# Altium PCB PCB.PcbDoc
Units mm, origin at the board's own origin, x right, y up, seen from the top; angles counter-clockwise.
Board outline 68 x 65 mm, 4 copper layers (L1, L2, L3, L4), stack 0.603 mm thick; 42 components, 21 nets, 130 pads, 601 vias.
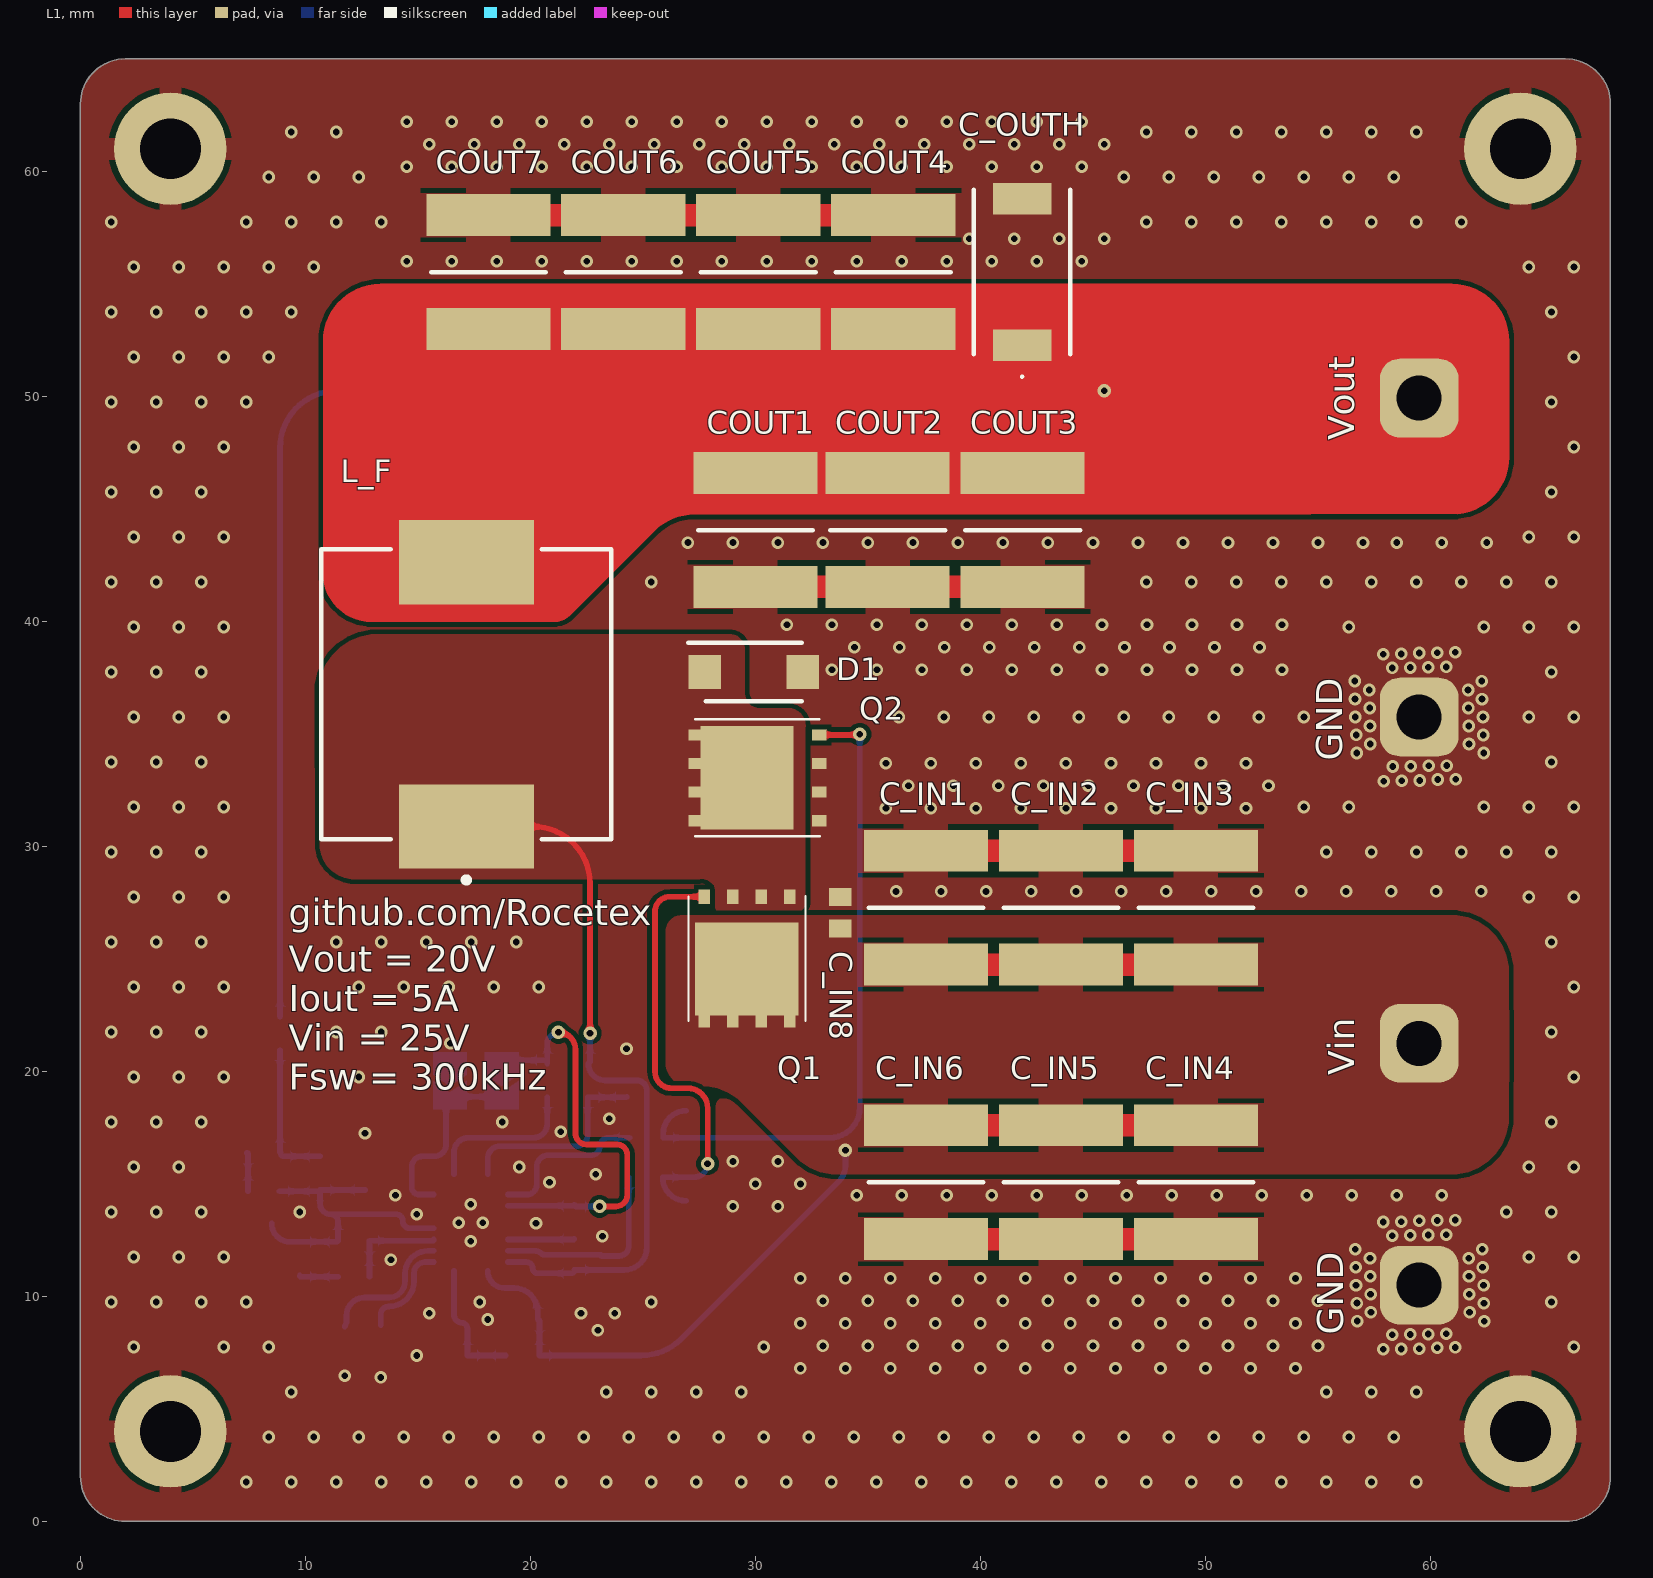
[diagram p0: L1 view]
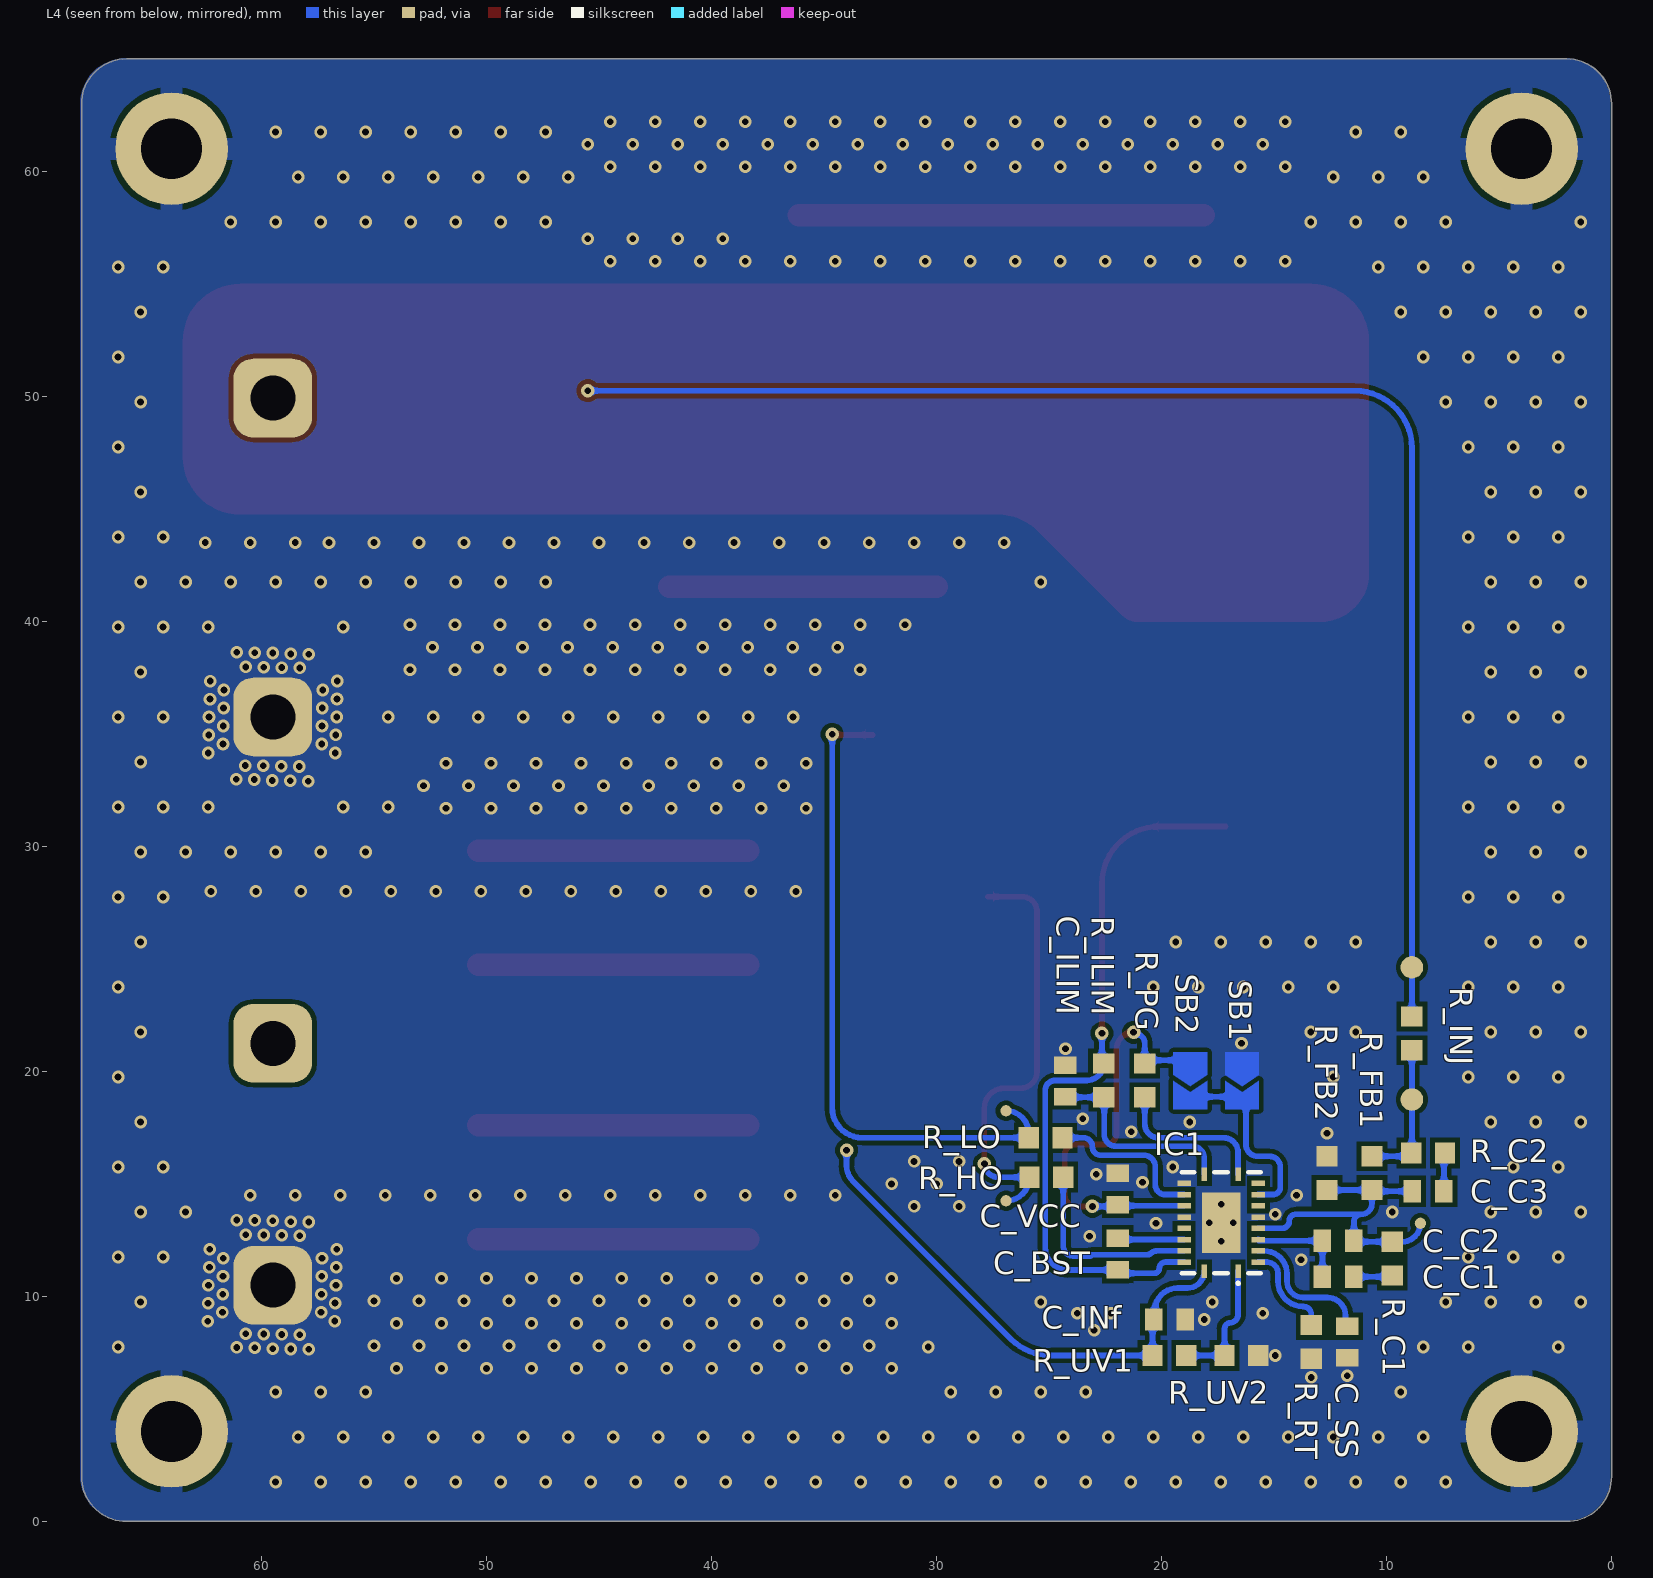
[diagram p1: L4 view, seen from below]
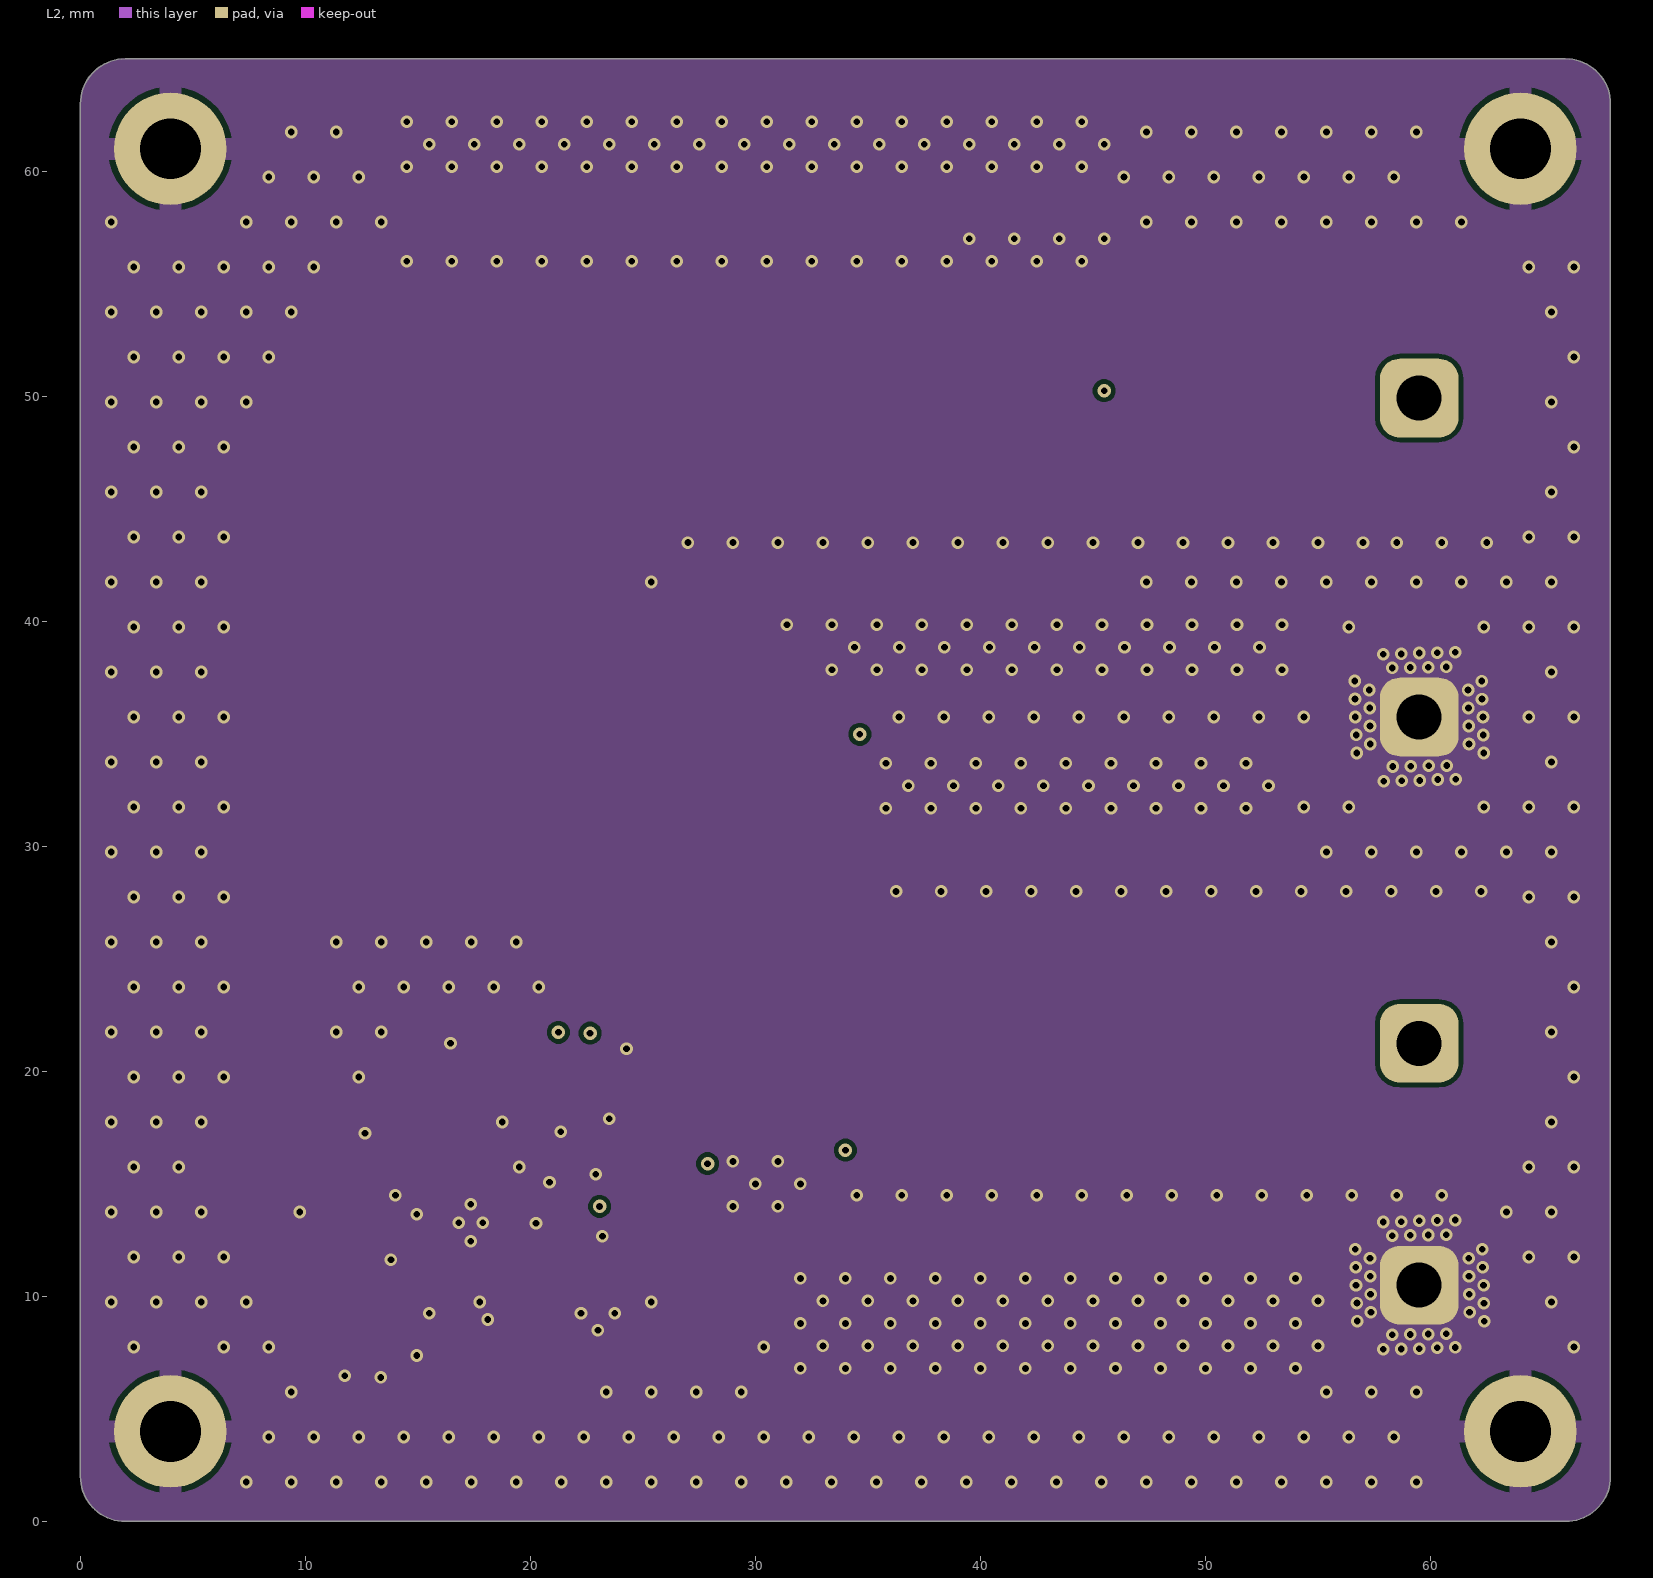
[diagram p2: L2]
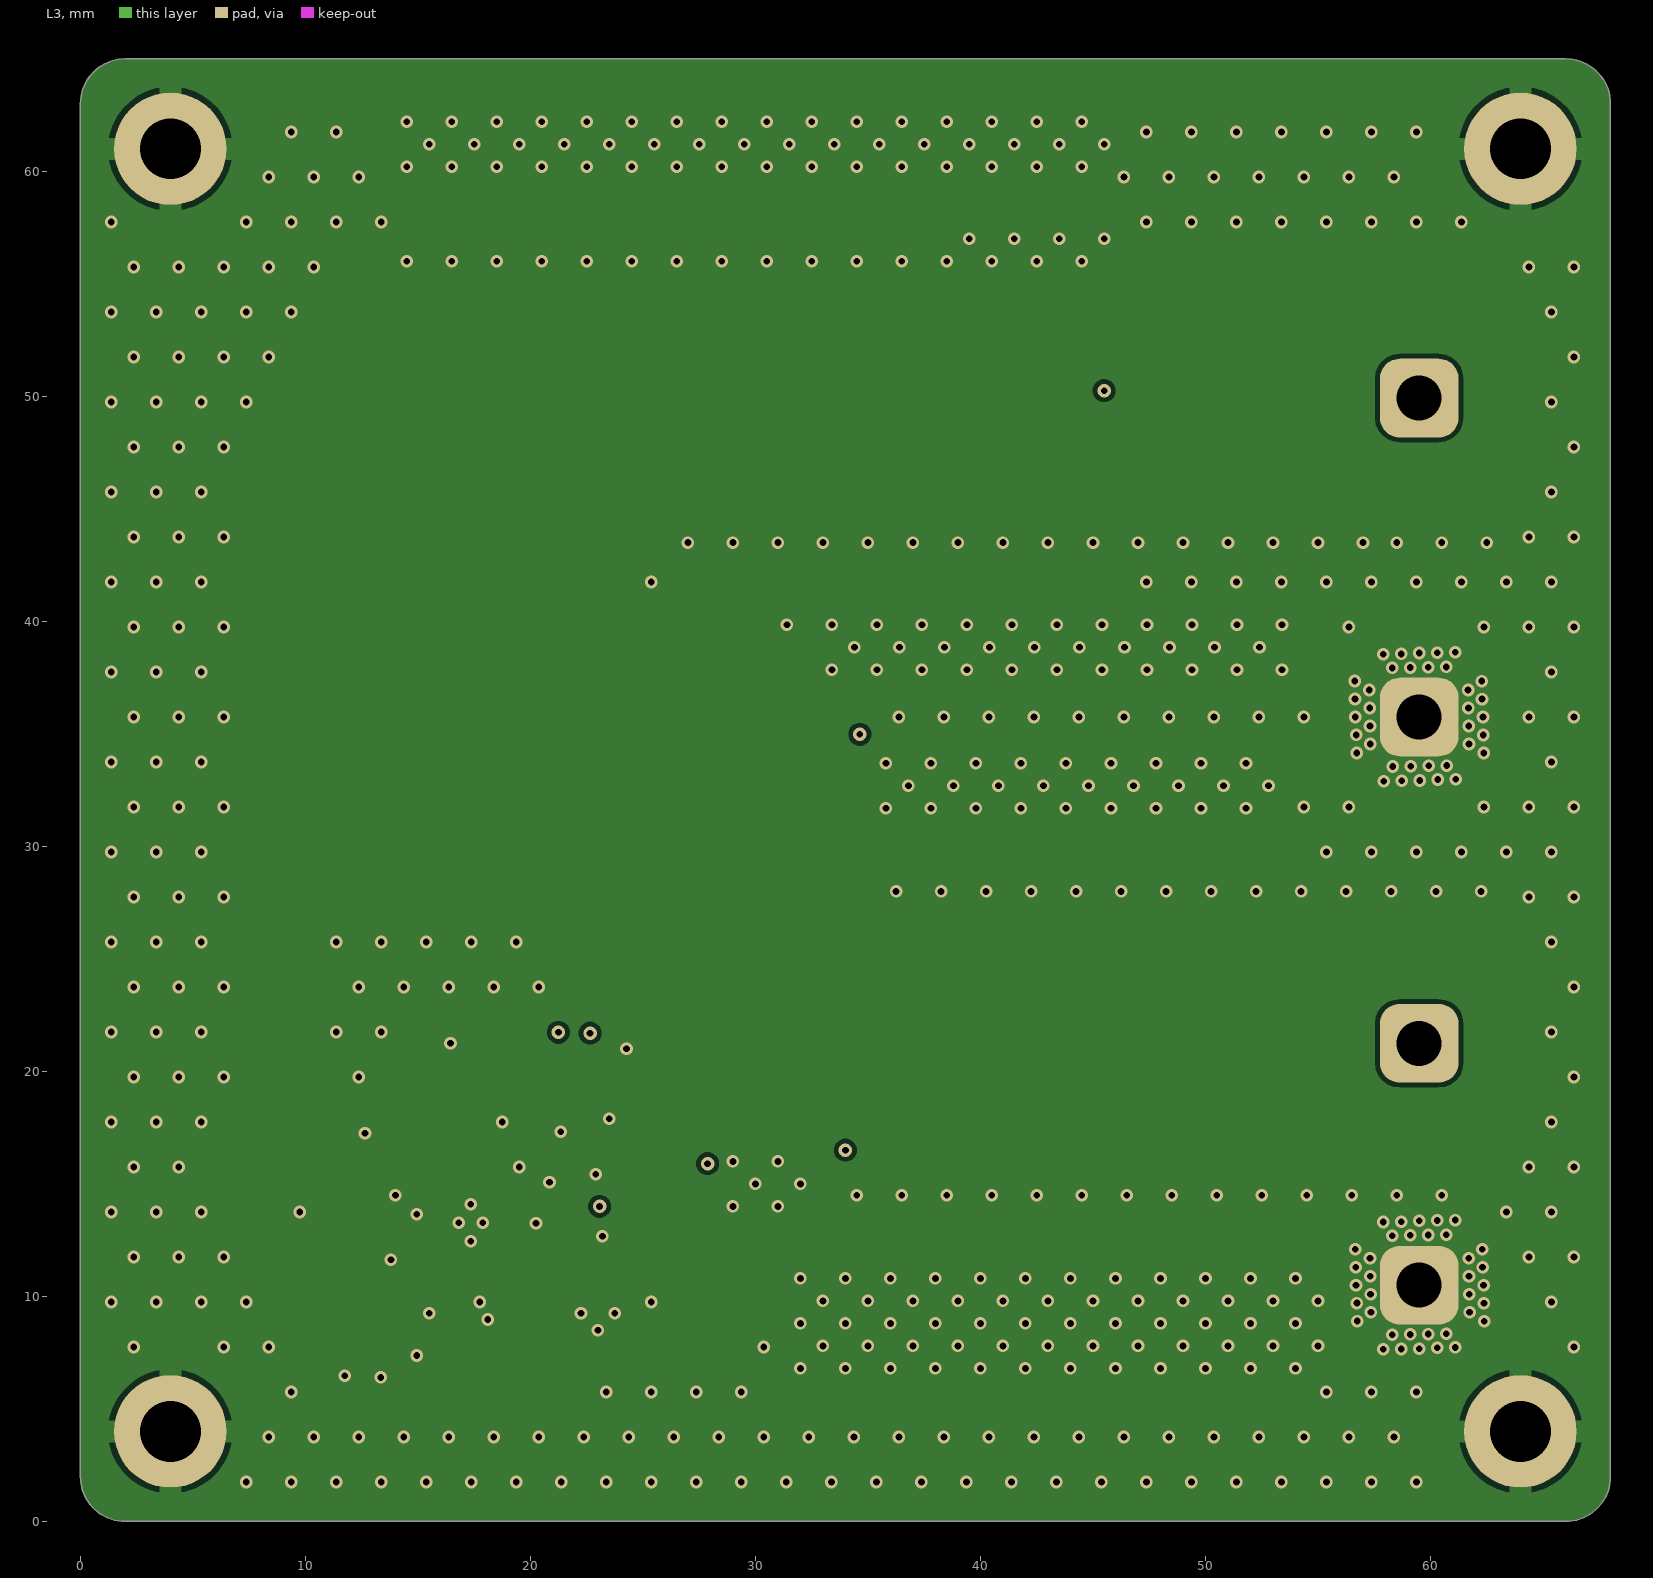
[diagram p3: L3]
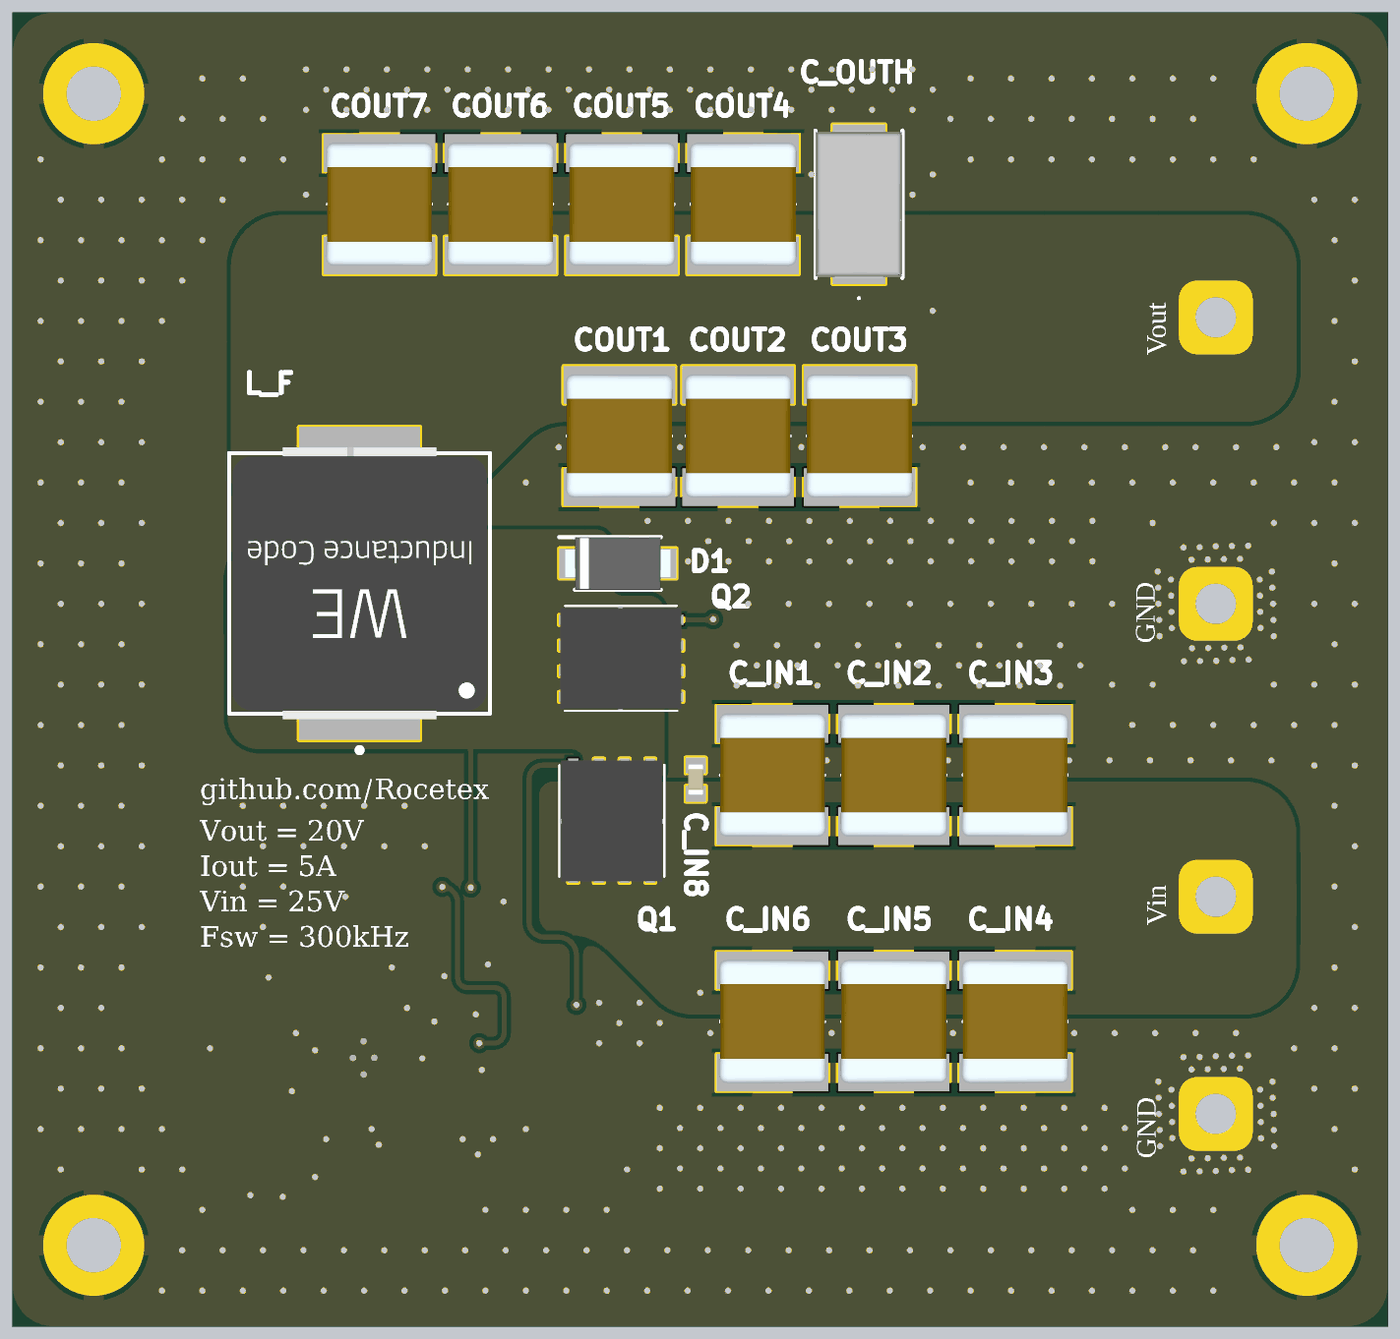
[diagram p4: 3D render of the assembled board from above, using the file's embedded part models]
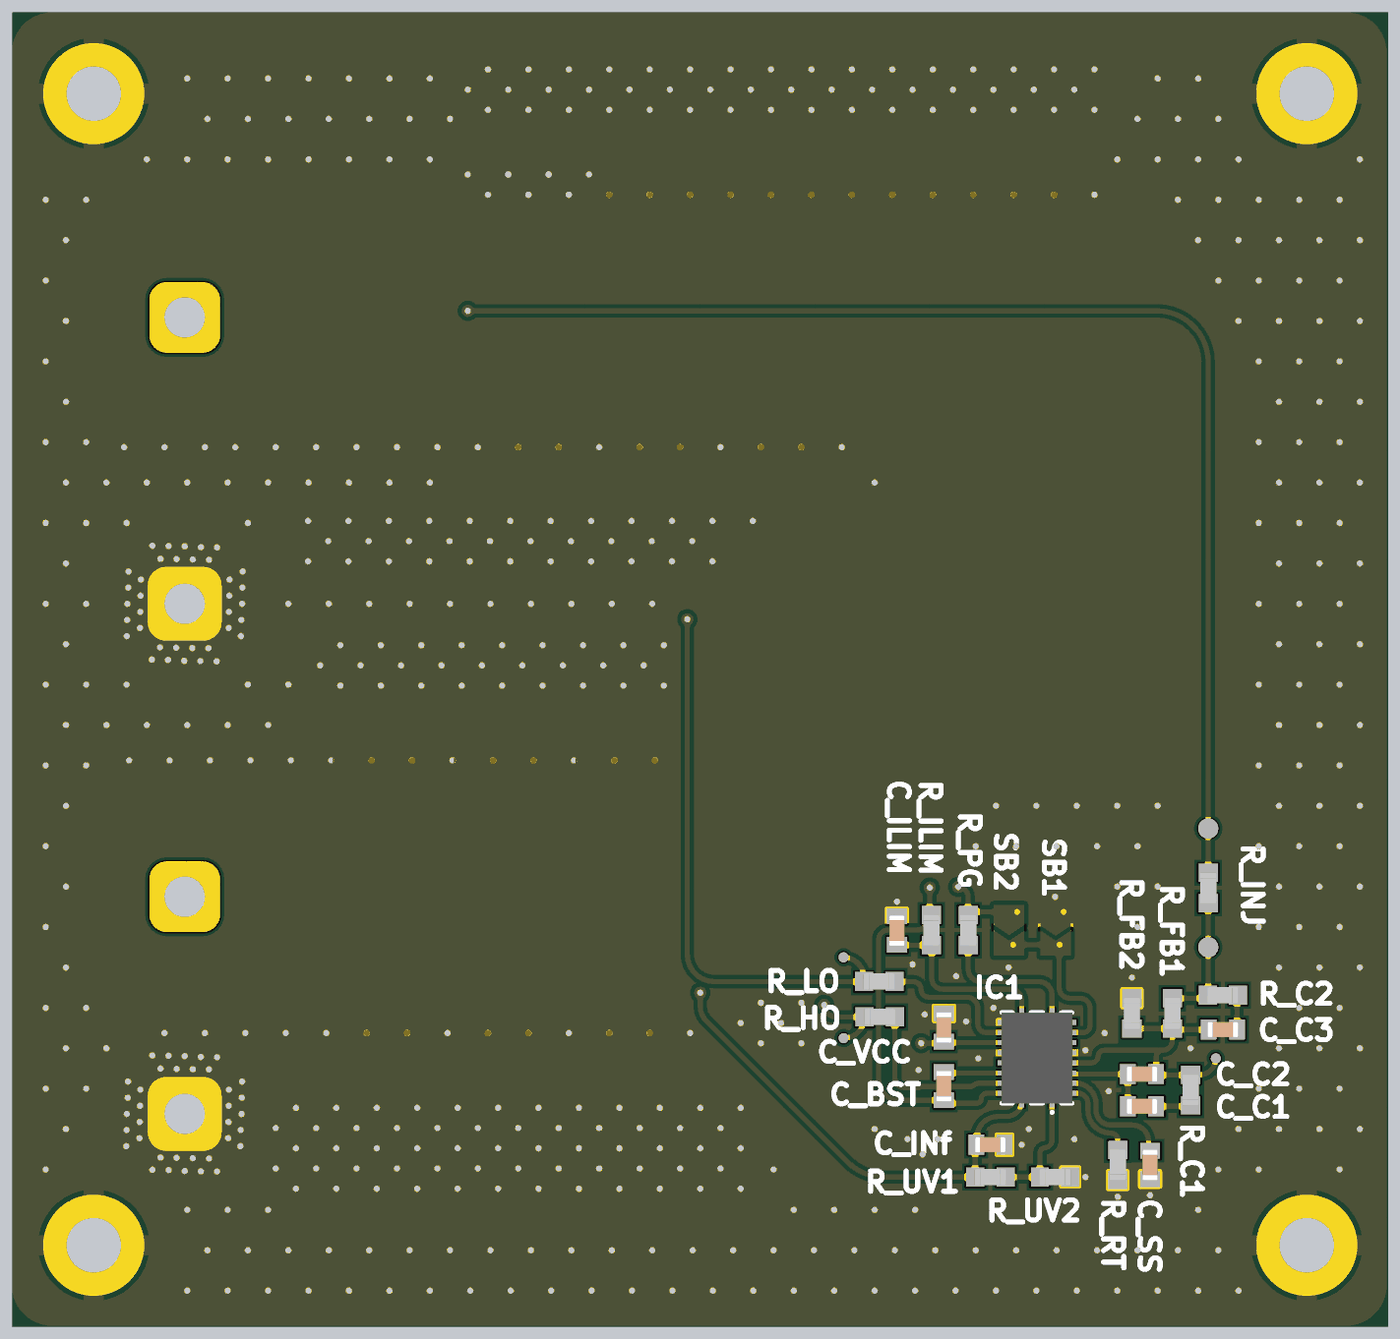
[diagram p5: 3D render of the assembled board from below, using the file's embedded part models]

## Layer stack, top to bottom
Top Solder: solder mask 0.0102, Solder Resist, Dk 3.5
L1: signal copper 0.035
Dielectric 2: prepreg 0.0711, PP-006, Dk 4.1
L2: signal copper 0.0356
Dielectric 1: dielectric 0.32, FR-4, Dk 4.8
L3: signal copper 0.0356
Dielectric 3: prepreg 0.0711, PP-006, Dk 4.1
L4: signal copper 0.035
Bottom Solder: solder mask 0.0102, Solder Resist, Dk 3.5

## Board outline
0,2 0,63 cw(c2,63) 2,65 66,65 cw(c66,63) 68,63 68,2 cw(c66,2) 66,0 2,0 cw(c2,2)

## Design rules (kind name [scope] priority, off if disabled: settings)
Clearance [All] p1: gap=0.12 ignorepadtopadclearanceinfootprint=FALSE except(0.2: Arc-Poly Arc-Hole Track-Poly Track-Hole SMDPad-Poly SMDPad-Hole THPad-Poly THPad-Hole Via-Poly Via-Hole Fill-Poly Fill-Hole Poly-Poly Poly-Region Poly-Hole Region-Hole Text-Hole; 0.254: Arc-Text Track-Text SMDPad-Text THPad-Text Via-Text Fill-Text Poly-Text Region-Text Text-Text)
HoleSize [All] p1: absolutevalues=TRUE maxlimit=5 minlimit=0.025 maxpercent=80.000 minpercent=20.000
HoleToHoleClearance [All] p1: gap=0.2 allowstackedmicrovias=TRUE
PolygonConnect [All] p1: connectstyle=Relief reliefconductorwidth=0.254 reliefentries=4 polygonreliefangle="90 Angle" airgapwidth=0.254
RoutingVias [All] p1: holewidth=0.3 width=0.6 viastyle="Through Hole" minholewidth=0.2 minwidth=0.5 maxholewidth=0.711 maxwidth=1.27
SolderMaskExpansion SolderMaskExpansion_Via [IsVia] p1: expansion=0.102 istentingtop=TRUE
SolderMaskExpansion [All] p2: expansion=0.102 istentingtop=FALSE
SupplyNets "Schematic Supply Nets_2" [InNet('VOUT')] p1: voltage=0.000
SupplyNets "Schematic Supply Nets_1" [InNet('GND')] p2: voltage=0.000
SupplyNets "Schematic Supply Nets" [InNet('VIN')] p3: voltage=0.000
Width [All] p1: maxlimit=5 minlimit=0.025 preferedwidth=0.254 minimp=50.000000 maximp=50.000000 favimp=50.000000
28 further rules are at their usual default settings.

## Components (designator, comment, footprint, x,y, rotation, side; value= is the part's Value field where it differs from the comment)
C_BST "100n" CAPC1608X90N 21.95,11.875 r270 bottom
C_C1 "47p" CAPC1608X90N 12.15,10.875 r180 bottom
C_C2 "47p" CAPC1608X90N 12.15,12.475 r180 bottom
C_C3 "47p" CAPC1608X90N 8.15,14.675 r0 bottom
C_ILIM "47p" CAPC1608X90N 24.275,19.575 r90 bottom
C_IN1 "10u" CAPC6153X390N 37.575,27.275 r90 top
C_IN2 "10u" CAPC6153X390N 43.575,27.275 r90 top
C_IN3 "10u" CAPC6153X390N 49.575,27.275 r90 top
C_IN4 "10u" CAPC6153X390N 49.575,15.075 r270 top
C_IN5 "10u" CAPC6153X390N 43.575,15.075 r270 top
C_IN6 "10u" CAPC6153X390N 37.575,15.075 r270 top
C_IN8 "100n" CAPC1608X90N 33.775,27.05 r90 top
C_INf "100n" CAPC1608X90N 19.65,8.975 r0 bottom
C_OUTH "68u" 35TQS68ME2 41.85,55.525 r90 top
C_SS "47n" CAPC1608X90N 11.75,7.975 r90 bottom
C_VCC "2.2u" CAPC1608X90N 21.95,14.775 r90 bottom
COUT1 "22u" CAPC6153X390N 30,44.058 r270 top
COUT2 "22u" CAPC6153X390N 35.875,44.058 r270 top
COUT3 "22u" CAPC6153X390N 41.875,44.058 r270 top
COUT4 "22u" CAPC6153X390N 36.125,55.525 r90 top
COUT5 "22u" CAPC6153X390N 30.125,55.525 r90 top
COUT6 "22u" CAPC6153X390N 24.125,55.525 r90 top
COUT7 "22u" CAPC6153X390N 18.135,55.525 r90 top
D1 "VSSAF3M10-M3_H" SODFL5226X100N 29.925,37.75 r0 top
IC1 "LM5145RGYR" RGY0020B 17.35,13.275 r0 bottom
L_F "8.2uH, 11.6A" WE-LHCA_1365 17.15,36.76 r180 top
Q1 "AON6512" AON6414A 29.625,25 r180 top
Q2 "AON6512" AON6414A 30.075,33.05 r90 top
R_C1 "127" RESC1608X55N 9.75,11.675 r270 bottom
R_C2 "127" RESC1608X55N 8.15,16.375 r180 bottom
R_FB1 "21k" RESC1608X55N 10.65,15.475 r270 bottom
R_FB2 "876" RESC1608X55N 12.65,15.475 r90 bottom
R_HO "1" RESC1608X55N 25.125,15.3 r180 bottom
R_ILIM "127" RESC1608X55N 22.575,19.6 r270 bottom
R_INJ "20" RESC1608X55N 8.875,21.688 r270 bottom
R_LO "1" RESC1608X55N 25.15,17.05 r180 bottom
R_PG "20k" RESC1608X55N 20.75,19.6 r90 bottom
R_RT "33.2k" RESC1608X55N 13.35,7.975 r270 bottom
R_UV1 "200k" RESC1608X55N 19.65,7.375 r180 bottom
R_UV2 "10k" RESC1608X55N 16.45,7.375 r0 bottom
SB1 "Solder_Bridge" Solderbridge 16.025,20.4 r0 bottom
SB2 "Solder_Bridge" Solderbridge 18.325,20.4 r0 bottom

## Footprints (in the part's own frame and the unit in brackets; to place one, negate y for a bottom-side part, rotate by r counter-clockwise, add the part's x,y. Pads: shape width x height; smd on the part's side, far side on the other; paste and mask are expansions set on the pad)
35TQS68ME2 [mm]
  rect 1.4x2.6 smd: 1(-3.25,0) 2(3.25,0)
  silkscreen extent -4.7,-2.15 3.65,2.15, body extent -3.65,-2.15 3.65,2.15, height 1.9
AON6414A [mm]
  rect 0.5x0.65 smd: 1(-1.905,-2.765) 2(-0.635,-2.765) 3(0.635,-2.765) 4(1.905,-2.765)
  rect 0.5x0.55 smd: 5(1.905,2.785) 6(0.635,2.785) 7(-0.635,2.785) 8(-1.905,2.785)
  rect 4.6x4.12 smd: 9(0,0.45)
  silkscreen extent -2.6,-2.79 2.6,2.77, body extent -2.52,-3.01 2.52,3.01, height 0.91
CAPC1608X90N [mm]
  rect 0.78x0.99 smd: 1(-0.7,0) 2(0.7,0)
  body extent -0.76,-0.38 0.76,0.38, height 0.91
CAPC6153X390N [mm]
  rect 1.86x5.52 smd: 1(-2.53,0) 2(2.53,0)
  silkscreen extent 0,-2.55 0,2.55, body extent -3.05,-2.65 3.05,2.65, height 3.9
RESC1608X55N [mm]
  rect 0.9x0.95 smd: 1(-0.75,0) 2(0.75,0)
  body extent -0.77,-0.4 0.77,0.4, height 0.46
RGY0020B [mm]
  rect 0.25x0.6 smd: 1(-0.75,2.15) 10(-0.75,-2.15) 11(0.75,-2.15) 20(0.75,2.15)
  rect 0.6x0.25 smd: 2(-1.65,1.75) 3(-1.65,1.25) 4(-1.65,0.75) 5(-1.65,0.25) 6(-1.65,-0.25) 7(-1.65,-0.75) 8(-1.65,-1.25) 9(-1.65,-1.75) 12(1.65,-1.75) 13(1.65,-1.25) 14(1.65,-0.75) 15(1.65,-0.25) 16(1.65,0.25) 17(1.65,0.75) 18(1.65,1.25) 19(1.65,1.75)
  rect 1.7x2.7 smd: 21(0,0)
  silkscreen extent -1.75,-2.25 1.75,2.71, body extent -1.75,-2.25 1.75,2.25, height 1
SODFL5226X100N [mm]
  rect 1.45x1.49 smd: 1(-2.175,0) 2(2.175,0)
  silkscreen extent -2.9,-1.3 2.12,1.3, body extent -2.6,-1.3 2.6,1.3, height 1
Solderbridge [mil]
  round 1 smd mask+5.12: 1(0,-3.94) 2(7.87,60.04)
  L1 region: 15.75,41.34 45.28,21.65 45.28,-17.72 -13.78,-17.72 -13.78,21.65
  L1 region: 45.28,32.48 15.75,52.17 -13.78,32.48 -13.78,81.69 45.28,81.69
WE-LHCA_1365 [mm] "SMD Power Inductor, 2-Leads, body 13.45 x 12.60 mm"
  rect 6x3.75 smd: 1(0,5.875) 2(0,-5.875)
  silkscreen extent -6.45,-6.45 6.45,8.37, body extent -6.3,-6.72 6.3,6.73, height 6.46

## Part data
C_BST C_IN8 C_INf C_SS: library part GRM1885C1H101JA01D, "Capacitor", Manufacturer_Name="Murata Electronics", Mouser Part Number=81-GRM39C101J50, Arrow Part Number=GRM1885C1H101JA01D, Arrow Price/Stock=https://www.arrow.com/en/products/grm1885c1h101ja01d/murata-manufacturing?utm_currency=USD&region=europe, Datasheet Link=https://search.murata.co.jp/Ceramy/image/img/A01X/G101/ENG/GRM1885C1H101JA01-01A.pdf, Height=0.9mm, Manufacturer_Part_Number=GRM1885C1H101JA01D, Mouser Price/Stock=https://www.mouser.co.uk/ProductDetail/Murata-Electronics/GRM1885C1H101JA01D?qs=H3lwsW1hsDt1I4guwPQ00A%3D%3D
C_C1 C_C2 C_C3 C_ILIM C_VCC: library part 06031A470JAT2A, "Capacitor", Manufacturer_Name="Kyocera AVX", Mouser Part Number=581-06031A470J, Arrow Part Number=06031A470JAT2A, Arrow Price/Stock=https://www.arrow.com/en/products/06031a470jat2a/avx, Datasheet Link=https://componentsearchengine.com/Datasheets/1/06031A100FAT2A.pdf, Height=0.9mm, Manufacturer_Part_Number=06031A470JAT2A, Mouser Price/Stock=https://www.mouser.co.uk/ProductDetail/AVX/06031A470JAT2A?qs=nNiE93Mz5OcjglFzY7DsjQ%3D%3D
C_IN1 C_IN2 C_IN3 C_IN4 C_IN5 C_IN6: library part KRM55QR71J106KH01K, "Capacitor / KRM55QR71J106KH01K", Manufacturer_Name="Murata Electronics", Mouser Part Number=81-KRM55QR71J106KH1K, Arrow Part Number=KRM55QR71J106KH01K, Arrow Price/Stock=https://www.arrow.com/en/products/krm55qr71j106kh01k/murata-manufacturing, Datasheet Link=https://search.murata.co.jp/Ceramy/image/img/A01X/G101/ENG/KRM55_25V-100V_E.pdf, Height=3.9mm, Manufacturer_Part_Number=KRM55QR71J106KH01K, Mouser Price/Stock=https://www.mouser.co.uk/ProductDetail/Murata-Electronics/KRM55QR71J106KH01K?qs=TpyF2b7C1Q%252BAGaaMhvrt1g%3D%3D
C_OUTH: library part 35TQS68ME2, "Capacitor Polarised", Manufacturer_Name=Panasonic, Datasheet Link=https://industrial.panasonic.com/cdbs/www-data/pdf/AAA8000/AAA8000C80.pdf, Height=2mm, Manufacturer_Part_Number=35TQS68ME2, Simulation Data=https://industrial.panasonic.com/content/data/CP/files/35TQS68ME2.zip
COUT1 COUT2 COUT3 COUT4 COUT5 COUT6 COUT7: library part KCM55QR71H226KH13K, "Capacitor / KCM55QR71H226KH13K", Manufacturer_Name="Murata Electronics", Mouser Part Number=81-KCM5QR71H226KH13K, Arrow Part Number=KCM55QR71H226KH13K, Arrow Price/Stock=https://www.arrow.com/en/products/kcm55qr71h226kh13k/murata-manufacturing?region=nac, Datasheet Link=https://search.murata.co.jp/Ceramy/image/img/A01X/G101/ENG/KCM55_E.pdf, Height=3.9mm, Manufacturer_Part_Number=KCM55QR71H226KH13K, Mouser Price/Stock=https://www.mouser.co.uk/ProductDetail/Murata-Electronics/KCM55QR71H226KH13K?qs=By6Nw2ByBD05%2F38SiX9q2w%3D%3D
D1: "Schottky Diode", Arrow Part Number=VSSAF3M10-M3/H, Manufacturer_Name=Vishay, Mouser Part Number=78-VSSAF3M10-M3/H, Arrow Price/Stock=https://www.arrow.com/en/products/vssaf3m10-m3h/vishay, Datasheet Link=https://www.vishay.com/docs/87507/vssaf3m10.pdf, Height=1mm, Manufacturer_Part_Number=VSSAF3M10-M3/H, Mouser Price/Stock=https://www.mouser.co.uk/ProductDetail/Vishay-General-Semiconductor/VSSAF3M10-M3-H?qs=ECv811tYSNjzBSZPydhz4A%3D%3D
IC1: "Integrated Circuit", Manufacturer_Name="Texas Instruments", Mouser Part Number=595-LM5145RGYR, Arrow Part Number=LM5145RGYR, Arrow Price/Stock=https://www.arrow.com/en/products/lm5145rgyr/texas-instruments?region=nac, Datasheet Link=http://www.ti.com/lit/ds/symlink/lm5145.pdf?HQS=TI-null-null-mousermode-df-pf-null-wwe&DCM=yes&ref_url=https%3A%2F%2Fwww.mouser.com%2F, Manufacturer_Part_Number=LM5145RGYR, Mouser Price/Stock=https://www.mouser.co.uk/ProductDetail/Texas-Instruments/LM5145RGYR?qs=gt1LBUVyoHkKVoSLabi7ZQ%3D%3D
L_F: library part 784373865082, "WE-LHCA Low Profile High Current Inductor, SMT, size 1365, 8.2uH, 11.6A", Case/Size Code=1365, DC Resistance=12mOhm, Inductance=8.2uH, Manufacturer="Wurth Elektronik", Max Operating Temperature=155°C, Min Operating Temperature=-55°C, Performance Rated Current=11.6A, Saturation Current=20.2A, Category="Power Inductors", ComponentLink1Description="Website Link", ComponentLink1URL=https://www.we-online.com/redexpert/article/784373865082?ad, ComponentLink2Description="Datasheet Link", ComponentLink2URL=https://www.we-online.com/redexpert/spec/784373865082?ad, Height=6.3mm, Length=13.45mm, Manufacturer Part Number=784373865082, Match Code=WE-LHCA, Mount="Surface Mount", Packaging="Tape and Reel", Width=12.6mm
Q1 Q2: "MOSFET (P-Channel)", Manufacturer_Name="Alpha & Omega Semiconductors", Arrow Part Number=AON6512, Arrow Price/Stock=https://www.arrow.com/en/products/aon6512/alpha-and-omega-semiconductor?region=nac, Datasheet Link=http://aosmd.com/res/data_sheets/AON6512.pdf, Manufacturer_Part_Number=AON6512
R_C1 R_C2 R_FB1 R_FB2 R_ILIM R_INJ R_PG: library part ERJ-3EKF1270V, "Resistor", Manufacturer_Name=Panasonic, Mouser Part Number=667-ERJ-3EKF1270V, Arrow Part Number=ERJ-3EKF1270V, Arrow Price/Stock=https://www.arrow.com/en/products/erj3ekf1270v/panasonic, Datasheet Link=http://industrial.panasonic.com/cdbs/www-data/pdf/RDA0000/AOA0000C86.pdf, Height=0.55mm, Manufacturer_Part_Number=ERJ-3EKF1270V, Mouser Price/Stock=https://www.mouser.co.uk/ProductDetail/Panasonic/ERJ-3EKF1270V?qs=iBwFsHVUAOcgnyLg6A6PxQ%3D%3D
R_HO R_LO R_RT R_UV1 R_UV2: library part RC0603FR-105K1L, "Resistor", Manufacturer_Name=YAGEO, Mouser Part Number=603-RC0603FR-105K1L, Arrow Part Number=RC0603FR-105K1L, Arrow Price/Stock=https://www.arrow.com/en/products/rc0603fr-105k1l/yageo?utm_currency=USD&region=nac, Datasheet Link=https://www.mouser.com/datasheet/2/447/PYu_RC_Group_51_RoHS_L_11-1984063.pdf, Height=0.55mm, Manufacturer_Part_Number=RC0603FR-105K1L, Mouser Price/Stock=https://www.mouser.co.uk/ProductDetail/YAGEO/RC0603FR-105K1L?qs=qpJ%252B%252B%252Bdg6p362H%2FoHYJ5dQ%3D%3D

## Free pads (board coordinates)
  round 5 hole 2.7 mask+0: MH2(4,4) MH2(4,61) MH2(64,4) MH2(64,61)
  rrect50% 3.5x3.5 hole 2 mask-2539.97: q6(59.5,10.5) q7(59.5,21.25) q8(59.5,49.925) q9(59.5,35.75)
  round 0.5 smd far side mask-2539.97: q10(8.5,13.25) q10(26.912,14.25) q10(26.912,18.25)
  round 1 smd far side mask-2539.97: q10(8.875,18.75) q10(8.875,24.627)

## Via types
v1: diameter 0.56, hole 0.3, L1 to L4, tented both sides, 594 vias
v2: diameter 0.6, hole 0.3, L1 to L4, tented both sides, 7 vias

## Nets (pads, with @x,y where several pads share a name; then routed paths per layer and width w, separated by ;. In a path a pad name is that pad's centre, name@x,y a point inside that pad or via, vN(x,y) a via of type N, cw(c..) or ccw(c..) an arc to the next point about the centre after c; other vN are vias at no path point)
COMP: C_C1.1 C_C2.1 IC1.4 | length 4.5
  L4 w0.254: C_C1.1 C_C2.1 15.65,12.475 ccw(c15.65,12.525) IC1.4
FB: C_C2.2 C_C3.2 IC1.5 pad.q10@8.5,13.25 R_C1.1 R_FB1.2 R_FB2.1 | length 14.8
  L4 w0.254: pad.q10@8.5,13.25 ccw(c9.325,13.25) 9.325,12.425 R_C1.1 C_C2.2@11.4,12.425 ; C_C3.2 R_FB1.2@10.6,14.675 ; C_C2.2 11.45,13.325 ccw(c11.125,13.325) 11.125,13.65 ; R_FB2.1 R_FB1.2 10.65,14.125 ccw(c11.125,14.125) 11.125,13.65 ; IC1.5 14.65,13.025 cw(c14.65,13.35) 14.325,13.35 ccw(c14.025,13.35) 14.025,13.65 11.125,13.65
GND: C_ILIM.2 C_IN1.2 C_IN2.2 C_IN3.2 C_IN4.2 C_IN5.2 C_IN6.2 C_IN8.2 C_INf.1 C_OUTH.2 C_SS.1 C_VCC.2 COUT1.2 COUT2.2 COUT3.2 COUT4.2 COUT5.2 COUT6.2 COUT7.2 D1.2 IC1.6 IC1.12 IC1.15 IC1.21 pad.MH2 pad.q6 pad.q9 Q2.1 Q2.2 Q2.3 R_FB2.2 R_RT.2 R_UV2.1 SB1.1 | length 53.9
  L1 w1: COUT7.2 COUT4.2 ; COUT1.2 COUT3.2 ; C_IN6.2@38.375,12.545 C_IN4.2@50.375,12.545 ; C_IN1.2@38.375,29.805 C_IN3.2@50.375,29.805
  other v1: 7.375,1.75 9.375,1.75 11.375,1.75 13.375,1.75 15.375,1.75 17.375,1.75 19.375,1.75 21.375,1.75 23.375,1.75 25.375,1.75 27.375,1.75 29.375,1.75 31.375,1.75 33.375,1.75 35.375,1.75 37.375,1.75 39.375,1.75 41.375,1.75 43.375,1.75 45.375,1.75 47.375,1.75 49.375,1.75 51.375,1.75 53.375,1.75 55.375,1.75 57.375,1.75 59.375,1.75 8.375,3.75 10.375,3.75 12.375,3.75 14.375,3.75 16.375,3.75 18.375,3.75 20.375,3.75 22.375,3.75 24.375,3.75 26.375,3.75 28.375,3.75 30.375,3.75 32.375,3.75 34.375,3.75 36.375,3.75 38.375,3.75 40.375,3.75 42.375,3.75 44.375,3.75 46.375,3.75 48.375,3.75 50.375,3.75 52.375,3.75 54.375,3.75 56.375,3.75 58.375,3.75 9.375,5.75 23.375,5.75 25.375,5.75 27.375,5.75 29.375,5.75 55.375,5.75 57.375,5.75 59.375,5.75 13.35,6.4 11.75,6.475 32,6.8 34,6.8 36,6.8 38,6.8 40,6.8 42,6.8 44,6.8 46,6.8 48,6.8 50,6.8 52,6.8 54,6.8 14.95,7.375 57.9,7.647 58.7,7.661 59.5,7.675 60.297,7.718 2.375,7.75 6.375,7.75 8.375,7.75 30.375,7.75 61.097,7.733 66.375,7.75 33,7.8 35,7.8 37,7.8 39,7.8 41,7.8 43,7.8 45,7.8 47,7.8 49,7.8 51,7.8 53,7.8 55,7.8 58.3,8.297 59.1,8.311 59.9,8.325 60.7,8.339 23,8.5 32,8.8 34,8.8 36,8.8 38,8.8 40,8.8 42,8.8 44,8.8 46,8.8 48,8.8 50,8.8 52,8.8 54,8.8 56.747,8.902 62.389,8.9 18.1,8.975 15.5,9.25 22.25,9.25 23.75,9.25 57.353,9.3 61.739,9.3 56.733,9.703 62.375,9.7 1.375,9.75 3.375,9.75 5.375,9.75 7.375,9.75 17.75,9.75 25.375,9.75 65.375,9.75 33,9.8 35,9.8 37,9.8 39,9.8 41,9.8 43,9.8 45,9.8 47,9.8 49,9.8 51,9.8 53,9.8 55,9.8 57.339,10.1 61.725,10.1 56.689,10.5 62.361,10.5 32,10.8 34,10.8 36,10.8 38,10.8 40,10.8 42,10.8 44,10.8 46,10.8 48,10.8 50,10.8 52,10.8 54,10.8 57.325,10.9 61.711,10.9 56.675,11.3 62.317,11.297 13.8,11.625 57.311,11.7 61.697,11.7 2.375,11.75 4.375,11.75 6.375,11.75 64.375,11.75 66.375,11.75 62.303,12.098 56.661,12.1 17.353,12.45 23.2,12.675 58.3,12.7 59.1,12.714 59.9,12.728 60.7,12.743 20.25,13.25 16.82,13.272 17.88,13.278 57.903,13.307 58.703,13.321 59.5,13.364 60.3,13.378 61.1,13.393 14.95,13.65 1.375,13.75 3.375,13.75 5.375,13.75 9.75,13.75 63.375,13.75 65.375,13.75 29,14 31,14 17.347,14.1 14,14.5 34.5,14.5 36.5,14.5 38.5,14.5 40.5,14.5 42.5,14.5 44.5,14.5 46.5,14.5 48.5,14.5 50.5,14.5 52.5,14.5 54.5,14.5 56.5,14.5 58.5,14.5 60.5,14.5 30,15 32,15 20.85,15.075 22.9,15.425 2.375,15.75 4.375,15.75 19.5,15.75 64.375,15.75 66.375,15.75 29,16 31,16 12.65,17.25 21.346,17.32 1.375,17.75 3.375,17.75 5.375,17.75 18.75,17.75 65.375,17.75 23.5,17.9 2.375,19.75 4.375,19.75 6.375,19.75 12.375,19.75 66.375,19.75 24.269,21.011 16.45,21.25 1.375,21.75 3.375,21.75 5.375,21.75 11.375,21.75 13.375,21.75 65.375,21.75 2.375,23.75 4.375,23.75 6.375,23.75 12.375,23.75 14.375,23.75 16.375,23.75 18.375,23.75 20.375,23.75 66.375,23.75 1.375,25.75 3.375,25.75 5.375,25.75 11.375,25.75 13.375,25.75 15.375,25.75 17.375,25.75 19.375,25.75 65.375,25.75 2.375,27.75 4.375,27.75 6.375,27.75 64.375,27.75 66.375,27.75 36.25,28 38.25,28 40.25,28 42.25,28 44.25,28 46.25,28 48.25,28 50.25,28 52.25,28 54.25,28 56.25,28 58.25,28 60.25,28 62.25,28 1.375,29.75 3.375,29.75 5.375,29.75 55.375,29.75 57.375,29.75 59.375,29.75 61.375,29.75 63.375,29.75 65.375,29.75 35.8,31.7 37.8,31.7 39.8,31.7 41.8,31.7 43.8,31.7 45.8,31.7 47.8,31.7 49.8,31.7 51.8,31.7 2.375,31.75 4.375,31.75 6.375,31.75 54.375,31.75 56.375,31.75 62.375,31.75 64.375,31.75 66.375,31.75 36.8,32.7 38.8,32.7 40.8,32.7 42.8,32.7 44.8,32.7 46.8,32.7 48.8,32.7 50.8,32.7 52.8,32.7 57.925,32.9 58.725,32.914 59.525,32.928 60.323,32.972 61.123,32.986 58.325,33.55 59.125,33.564 59.925,33.578 60.725,33.593 35.8,33.7 37.8,33.7 39.8,33.7 41.8,33.7 43.8,33.7 45.8,33.7 47.8,33.7 49.8,33.7 51.8,33.7 1.375,33.75 3.375,33.75 5.375,33.75 65.375,33.75 56.718,34.153 62.364,34.15 57.325,34.55 61.714,34.55 56.704,34.953 62.35,34.95 57.311,35.35 61.7,35.35 2.375,35.75 4.375,35.75 6.375,35.75 36.375,35.75 38.375,35.75 40.375,35.75 42.375,35.75 44.375,35.75 46.375,35.75 48.375,35.75 50.375,35.75 52.375,35.75 54.375,35.75 56.661,35.75 62.336,35.75 64.375,35.75 66.375,35.75 57.297,36.15 61.686,36.15 56.647,36.55 62.292,36.547 57.282,36.95 61.672,36.95 56.632,37.35 62.278,37.348 1.375,37.75 3.375,37.75 5.375,37.75 65.375,37.75 33.4,37.85 35.4,37.85 37.4,37.85 39.4,37.85 41.4,37.85 43.4,37.85 45.4,37.85 47.4,37.85 49.4,37.85 51.4,37.85 53.4,37.85 58.3,37.932 59.1,37.947 59.9,37.961 60.7,37.975 57.902,38.539 58.702,38.553 59.5,38.597 60.3,38.611 61.1,38.625 34.4,38.85 36.4,38.85 38.4,38.85 40.4,38.85 42.4,38.85 44.4,38.85 46.4,38.85 48.4,38.85 50.4,38.85 52.4,38.85 2.375,39.75 4.375,39.75 6.375,39.75 56.375,39.75 62.375,39.75 64.375,39.75 66.375,39.75 31.4,39.85 33.4,39.85 35.4,39.85 37.4,39.85 39.4,39.85 41.4,39.85 43.4,39.85 45.4,39.85 47.4,39.85 49.4,39.85 51.4,39.85 53.4,39.85 1.375,41.75 3.375,41.75 5.375,41.75 25.375,41.75 47.375,41.75 49.375,41.75 51.375,41.75 53.375,41.75 55.375,41.75 57.375,41.75 59.375,41.75 61.375,41.75 63.375,41.75 65.375,41.75 27,43.5 29,43.5 31,43.5 33,43.5 35,43.5 37,43.5 39,43.5 41,43.5 43,43.5 45,43.5 47,43.5 49,43.5 51,43.5 53,43.5 55,43.5 57,43.5 58.5,43.5 60.5,43.5 62.5,43.5 2.375,43.75 4.375,43.75 6.375,43.75 64.375,43.75 66.375,43.75 1.375,45.75 3.375,45.75 5.375,45.75 65.375,45.75 2.375,47.75 4.375,47.75 6.375,47.75 66.375,47.75 1.375,49.75 3.375,49.75 5.375,49.75 7.375,49.75 65.375,49.75 2.375,51.75 4.375,51.75 6.375,51.75 8.375,51.75 66.375,51.75 1.375,53.75 3.375,53.75 5.375,53.75 7.375,53.75 9.375,53.75 65.375,53.75 2.375,55.75 4.375,55.75 6.375,55.75 8.375,55.75 10.375,55.75 64.375,55.75 66.375,55.75 14.5,56 16.5,56 18.5,56 20.5,56 22.5,56 24.5,56 26.5,56 28.5,56 30.5,56 32.5,56 34.5,56 36.5,56 38.5,56 40.5,56 42.5,56 44.5,56 39.5,57 41.5,57 43.5,57 45.5,57 1.375,57.75 7.375,57.75 9.375,57.75 11.375,57.75 13.375,57.75 47.375,57.75 49.375,57.75 51.375,57.75 53.375,57.75 55.375,57.75 57.375,57.75 59.375,57.75 61.375,57.75 8.375,59.75 10.375,59.75 12.375,59.75 46.375,59.75 48.375,59.75 50.375,59.75 52.375,59.75 54.375,59.75 56.375,59.75 58.375,59.75 14.5,60.2 16.5,60.2 18.5,60.2 20.5,60.2 22.5,60.2 24.5,60.2 26.5,60.2 28.5,60.2 30.5,60.2 32.5,60.2 34.5,60.2 36.5,60.2 38.5,60.2 40.5,60.2 42.5,60.2 44.5,60.2 15.5,61.2 17.5,61.2 19.5,61.2 21.5,61.2 23.5,61.2 25.5,61.2 27.5,61.2 29.5,61.2 31.5,61.2 33.5,61.2 35.5,61.2 37.5,61.2 39.5,61.2 41.5,61.2 43.5,61.2 45.5,61.2 9.375,61.75 11.375,61.75 47.375,61.75 49.375,61.75 51.375,61.75 53.375,61.75 55.375,61.75 57.375,61.75 59.375,61.75 14.5,62.2 16.5,62.2 18.5,62.2 20.5,62.2 22.5,62.2 24.5,62.2 26.5,62.2 28.5,62.2 30.5,62.2 32.5,62.2 34.5,62.2 36.5,62.2 38.5,62.2 40.5,62.2 42.5,62.2 44.5,62.2
NetC_BST_1: C_BST.1 IC1.17 | length 3
  L4 w0.254: IC1.17 21.925,12.525 C_BST.1@21.95,12.55
NetC_C1_2: C_C1.2 R_C1.2 | length 1.7
  L4 w0.254: R_C1.2 ccw(c9.8,10.925) 9.8,10.875 C_C1.2
NetC_C3_1: C_C3.1 R_C2.2 | length 1.7
  L4 w0.254: R_C2.2 cw(c7.4,16.325) 7.45,16.325 C_C3.1
NetC_ILIM_1: C_ILIM.1 IC1.11 R_ILIM.2 | length 9.1
  L4 w0.254: IC1.11 18.1,16.125 cw(c18.65,16.125) 18.65,16.675 22.025,16.675 ccw(c22.025,17.2) 22.55,17.2 22.55,18.825 cw(c22.575,18.825) R_ILIM.2 24.25,18.85 ccw(c24.25,18.875) C_ILIM.1
NetC_SS_2: C_SS.2 IC1.3 | length 6.2
  L4 w0.254: C_SS.2@11.75,8.65 11.825,8.848 11.825,9.15 cw(c12.625,9.15) 12.625,9.95 13.7,9.95 ccw(c13.7,10.675) 14.425,10.675 14.425,11 cw(c15.45,11) 15.45,12.025 IC1.3
NetIC1_1: IC1.1 R_UV1.2 R_UV2.2 | length 5.8
  L4 w0.254: IC1.1 16.6,9.2 ccw(c16.975,9.2) 16.958,8.825 cw(c16.946,8.572) 17.2,8.572 R_UV2.2 R_UV1.2
NetIC1_2: IC1.2 R_RT.1 | length 4.3
  L4 w0.254: R_RT.1 13.35,9.2 cw(c13.7,9.2) 13.7,9.55 ccw(c13.7,10.675) 14.825,10.675 14.825,11.025 cw(c15.325,11.025) 15.325,11.525 IC1.2
NetIC1_8: IC1.8 SB1.2 SB2.2 | length 8.6
  L4 w0.254: IC1.8 15.05,14.525 cw(c15.05,14.85) 14.725,14.85 14.725,15.75 cw(c15.2,15.75) 15.2,16.225 15.725,16.225 ccw(c15.725,16.75) 16.25,16.75 16.25,18.85 ccw(c16.225,18.85) SB1.2 SB2.2
NetIC1_10: IC1.10 R_PG.1 | length 7
  L4 w0.254: IC1.10 16.6,16.4 cw(c17.25,16.4) 17.25,17.05 20.125,17.05 ccw(c20.125,17.675) 20.75,17.674 R_PG.1
NetIC1_13: IC1.13 R_LO.2 | length 7.2
  L4 w0.254: IC1.13 19.85,14.525 ccw(c19.85,14.95) 20.275,14.95 20.275,15.75 cw(c20.8,15.75) 20.8,16.275 22.7,16.275 ccw(c22.7,16.65) 23.075,16.65 cw(c23.475,16.65) 23.475,17.05 R_LO.2
NetIC1_18: IC1.18 R_HO.2 | length 8.8
  L4 w0.254: IC1.18 20.198,12.025 cw(c20.198,11.598) 20.5,11.9 ccw(c20.621,12.021) 20.621,11.85 23.125,11.85 ccw(c23.175,11.85) 23.175,11.8 23.925,11.8 ccw(c23.925,12.25) 24.375,12.25 R_HO.2
NetQ1_4: pad.q10@26.912,14.25 Q1.4 R_HO.1 | length 19.4
  L1 w0.254: Q1.4 26.204,27.765 ccw(c26.204,27.094) 25.533,27.094 25.533,20 ccw(c26.283,20) 26.283,19.25 27,19.25 cw(c27,18.375) 27.875,18.375 v2(27.875,15.9)
  L4 w0.254: pad.q10@26.912,14.25 cw(c26.912,15.287) 25.875,15.287 R_HO.1 27.275,15.3 ccw(c27.275,15.9) v2(27.875,15.9)
NetQ2_4: pad.q10@26.912,18.25 Q2.4 R_LO.1 | length 29.7
  L1 w0.254: Q2.4 34.612,34.955 ccw(c34.612,34.983) v2(34.641,34.983)
  L4 w0.254: pad.q10@26.912,18.25 ccw(c26.912,17.238) 25.9,17.238 R_LO.1 33.3,17.05 ccw(c33.3,18.391) 34.641,18.391 v2(34.641,34.983)
NetR_C2_1: pad.q10@8.875,18.75 R_C2.1 R_FB1.1 R_INJ.2 | length 6.4
  L4 w0.254: R_INJ.2 8.875,18.75 8.875,16.435 ccw(c8.96,16.435) R_C2.1 ccw(c9.05,16.375) 9.05,16.225 R_FB1.1
SW: C_BST.2 D1.1 IC1.19 L_F.1 Q1.1 Q1.2 Q1.3 Q2.5 Q2.6 Q2.7 Q2.8 Q2.9 R_ILIM.1 | length 32.4
  L1 w0.254: L_F.1 20.11,30.885 cw(c20.11,28.345) 22.65,28.345 v2(22.65,21.7)
  L4 w0.254: IC1.19 19.825,11.525 cw(c19.825,11.25) 20.1,11.25 ccw(c20.325,11.25) 20.325,11.025 21.8,11.025 ccw(c21.8,11.175) C_BST.2 24.175,11.175 ccw(c24.175,12.175) 25.175,12.175 25.175,19.15 ccw(c24.725,19.15) 24.725,19.6 23.325,19.6 cw(c23.325,20.35) R_ILIM.1 22.65,20.425 v2(22.65,21.7)
VCC: C_VCC.1 IC1.14 R_PG.2 SB2.1 | length 19.4
  L1 w0.254: v2(21.243,21.738) cw(c21.243,20.981) 22,20.981 22,17.25 ccw(c22.5,17.25) 22.5,16.75 23.85,16.75 cw(c23.85,16.3) 24.3,16.3 24.3,14.5 cw(c23.8,14.5) 23.8,14 v2(23.075,14)
  L4 w0.254: SB2.1 20.6,20.5 cw(c20.6,20.35) R_PG.2 20.75,21.275 cw(c21.125,21.275) 21.125,21.65 cw(c21.213,21.65) 21.213,21.738 v2(21.243,21.738) ; IC1.14 21.9,14.025 ccw(c21.9,14.075) C_VCC.1 22.025,14 v2(23.075,14)
VIN: C_IN1.1 C_IN2.1 C_IN3.1 C_IN4.1 C_IN5.1 C_IN6.1 C_IN8.1 C_INf.2 IC1.20 pad.q7 Q1.5 Q1.6 Q1.7 Q1.8 Q1.9 R_UV1.1 | length 47.1
  L1 w1: C_IN6.1@38.375,17.605 C_IN4.1@50.375,17.605 ; C_IN1.1@38.375,24.745 C_IN3.1@50.375,24.745
  L4 w0.254: IC1.20 ccw(c18.85,11.125) 18.85,10.375 19.275,10.375 cw(c19.275,9.325) 20.325,9.325 20.325,8.975 cw(c20.325,8.9) 20.4,8.9 R_UV1.1 24.919,7.375 ccw(c24.919,9.915) 26.715,8.119 33.712,15.116 ccw(c33.016,15.811) 34,15.811 v2(34,16.5)
VOUT: C_OUTH.1 COUT1.1 COUT2.1 COUT3.1 COUT4.1 COUT5.1 COUT6.1 COUT7.1 L_F.2 pad.q8 pad.q10@8.875,24.627 R_INJ.1 | length 63.3
  L4 w0.254: R_INJ.1 8.875,24.627 8.875,47.71 cw(c11.415,47.71) 11.415,50.25 v2(45.5,50.25)
pads on no net: IC1.7 IC1.9 IC1.16

## Polygon pours and split planes (outlines as drawn)
GND on L1 "GND_L01_P004" (solid, pour order 4): 0,2 0,63 cw(c2,63) 2,65 66,65 cw(c66,63) 68,63 68,2 cw(c66,2) 66,0 2,0 cw(c2,2)
VIN on L1 "VIN_L01_P002" (solid, pour order 2): 60.935,15.425 ccw(c60.935,17.965) 63.475,17.965 63.495,21.075 63.475,24.41 ccw(c60.935,24.41) 60.935,26.95 53.8,26.95 26.875,26.95 26.725,26.95 ccw(c26.725,26.25) 26.025,26.25 26.025,20.35 ccw(c27.025,20.35) 27.025,19.35 27.598,19.35 cw(c27.598,16.81) 29.394,18.606 31.831,16.169 ccw(c33.627,17.965) 33.627,15.425 34.5,15.425
SW on L1 "SW_L01_P003" (solid, pour order 3): 29.525,36.8 ccw(c30.175,36.8) 30.175,36.15 31.525,36.15 cw(c31.425,35.35) 32.225,35.25 32.225,27.498 cw(c31.776,27.499) 31.774,27.05 cw(c31.774,27.051) 31.774,27.05 28.5,27.05 cw(c28.5,27.325) 28.225,27.325 28.225,28.05 ccw(c27.625,27.95) 27.525,28.55 12.184,28.55 cw(c12.184,30.099) 10.634,30.099 10.634,32.194 cw(c11.82,32.194) 10.64,32.31 10.625,34.65 10.625,36.885 cw(c13.165,36.885) 13.165,39.425 27.387,39.425 28.875,39.425 cw(c28.875,38.775) 29.525,38.775
GND on L3 "GND_L03_P017" (solid, remove dead copper, pour order 17): 0,2 0,63 cw(c2,63) 2,65 66,65 cw(c66,63) 68,63 68,2 cw(c66,2) 66,0 2,0 cw(c2,2)
GND on L2 "GND_L02_P018" (solid, remove dead copper, pour order 18): 0,2 0,63 cw(c2,63) 2,65 66,65 cw(c66,63) 68,63 68,2 cw(c66,2) 66,0 2,0 cw(c2,2)
GND on L4 "tge" (solid, remove dead copper, pour order 16): 0.05,2.02 0.05,63.02 cw(c2.05,63.02) 2.05,65.02 66.05,65.02 cw(c66.05,63.02) 68.05,63.02 68.05,2.02 cw(c66.05,2.02) 66.05,0.02 2.05,0.02 cw(c2.05,2.02)

## Other copper
L1:
  pour cut-out: 28.633,18.929 28.95,18.725 28.757,18.787 ccw(c28.641,18.511) 28.642,18.81 28.495,18.81 ccw(c28.494,18.606) 28.35,18.75 ccw(c28.692,18.408) 28.208,18.408 28.208,17.675 27.822,19.135 28.058,19.135 cw(c28.058,18.229)
  region net VOUT: 54.675,44.75 60.953,44.75 ccw(c60.953,47.29) 63.493,47.29 63.5,50.359 63.5,52.46 ccw(c60.96,52.46) 60.96,55 13.326,55 ccw(c13.326,52.46) 10.786,52.46 10.786,42.125 ccw(c12.945,42.132) 12.952,39.973 21.082,39.973 ccw(c21.082,40.918) 21.75,40.25 25.506,44.006 cw(c27.302,42.21) 27.302,44.75
L4:
  pour cut-out: 12.975,14.075 12.975,13.983 13.35,13.983 cw(c13.35,14.01) 13.323,14.01 13.323,14.075
  pour cut-out: 12.675,8.085 12.675,8.525 ccw(c12.65,8.525) 12.65,8.55 12.475,8.55 ccw(c12.475,8.525) 12.45,8.525 12.45,8.085
  pour cut-out: 10.425,11.775 9.075,11.775 9.075,11.575 10.425,11.575 10.425,11.208 10.86,11.208 10.86,11.57 12.04,11.57 12.04,10.18 12.221,10.18 ccw(c12.221,10.219) 12.26,10.219 12.26,11.57 12.517,11.57 12.517,11.78 12.26,11.78 12.26,13.17 13.44,13.17 13.44,12.808 14.246,12.808 14.246,12.824 ccw(c14.185,12.824) 14.185,12.885 14.185,12.917 ccw(c14.08,12.917) 14.08,13.021 14.08,13.114 ccw(c14.015,13.114) 14.015,13.18 14.015,13.299 ccw(c13.997,13.299) 13.997,13.317 11.783,13.317 11.783,13.17 12.04,13.17 12.04,11.78 10.86,11.78 10.86,12.092 10.425,12.092

## Silkscreen, mask and mechanical layers (free items; w line width, h text height)
Top Overlay:
  text "Vout" at 57.024,48.051 h2 r90
  text "GND" at 56.474,33.8 h2 r90
  text "github.com/Rocetex" at 9.25,26.088 h2
  text "Vout = 20V" at 9.25,24.025 h2
  text "Iout = 5A" at 9.25,22.275 h2
  text "Vin = 25V" at 9.25,20.525 h2
  text "Vin" at 57.024,19.826 h2 r90
  text "Fsw = 300kHz" at 9.25,18.775 h2
  text "GND" at 56.524,8.3 h2 r90
Top Solder:
  region: 57.675,34.837 57.675,36.662 cw(c58.588,36.662) 58.588,37.575 60.413,37.575 cw(c60.413,36.662) 61.325,36.662 61.325,34.837 cw(c60.413,34.837) 60.413,33.925 58.588,33.925 cw(c58.588,34.837)
  region: 57.675,9.587 57.675,11.412 cw(c58.588,11.412) 58.588,12.325 60.413,12.325 cw(c60.413,11.412) 61.325,11.412 61.325,9.587 cw(c60.413,9.587) 60.413,8.675 58.588,8.675 cw(c58.588,9.587)
  region: 57.675,20.338 57.675,22.163 cw(c58.588,22.163) 58.588,23.075 60.413,23.075 cw(c60.413,22.163) 61.325,22.163 61.325,20.338 cw(c60.413,20.338) 60.413,19.425 58.588,19.425 cw(c58.588,20.338)
  region: 57.675,49.013 57.675,50.838 cw(c58.588,50.838) 58.588,51.75 60.413,51.75 cw(c60.413,50.838) 61.325,50.838 61.325,49.013 cw(c60.413,49.013) 60.413,48.1 58.588,48.1 cw(c58.588,49.013)
Bottom Solder:
  circle w0.325: c26.912,14.25 r0.162
  circle w0.325: c26.912,18.25 r0.162
  circle w0.325: c8.5,13.25 r0.162
  circle w0.575: c8.875,24.627 r0.288
  circle w0.575: c8.875,18.75 r0.288
  region: 57.675,34.837 57.675,36.662 cw(c58.588,36.662) 58.588,37.575 60.413,37.575 cw(c60.413,36.662) 61.325,36.662 61.325,34.837 cw(c60.413,34.837) 60.413,33.925 58.588,33.925 cw(c58.588,34.837)
  region: 57.675,9.587 57.675,11.412 cw(c58.588,11.412) 58.588,12.325 60.413,12.325 cw(c60.413,11.412) 61.325,11.412 61.325,9.587 cw(c60.413,9.587) 60.413,8.675 58.588,8.675 cw(c58.588,9.587)
  region: 57.675,20.338 57.675,22.163 cw(c58.588,22.163) 58.588,23.075 60.413,23.075 cw(c60.413,22.163) 61.325,22.163 61.325,20.338 cw(c60.413,20.338) 60.413,19.425 58.588,19.425 cw(c58.588,20.338)
  region: 57.675,49.013 57.675,50.838 cw(c58.588,50.838) 58.588,51.75 60.413,51.75 cw(c60.413,50.838) 61.325,50.838 61.325,49.013 cw(c60.413,49.013) 60.413,48.1 58.588,48.1 cw(c58.588,49.013)
Mechanical 1:
  the board outline again, w0.254